# Altium PCB CT310高端控制盒H区按键电路V1.0.PcbDoc
Units mil, origin at the board's own origin, x right, y up, seen from the top; angles counter-clockwise.
Board outline 1460 x 2184.91 mil, 2 copper layers (Top Layer, Bottom Layer), stack 65.792 mil thick; 6 components, 6 nets, 32 pads, 1 vias.
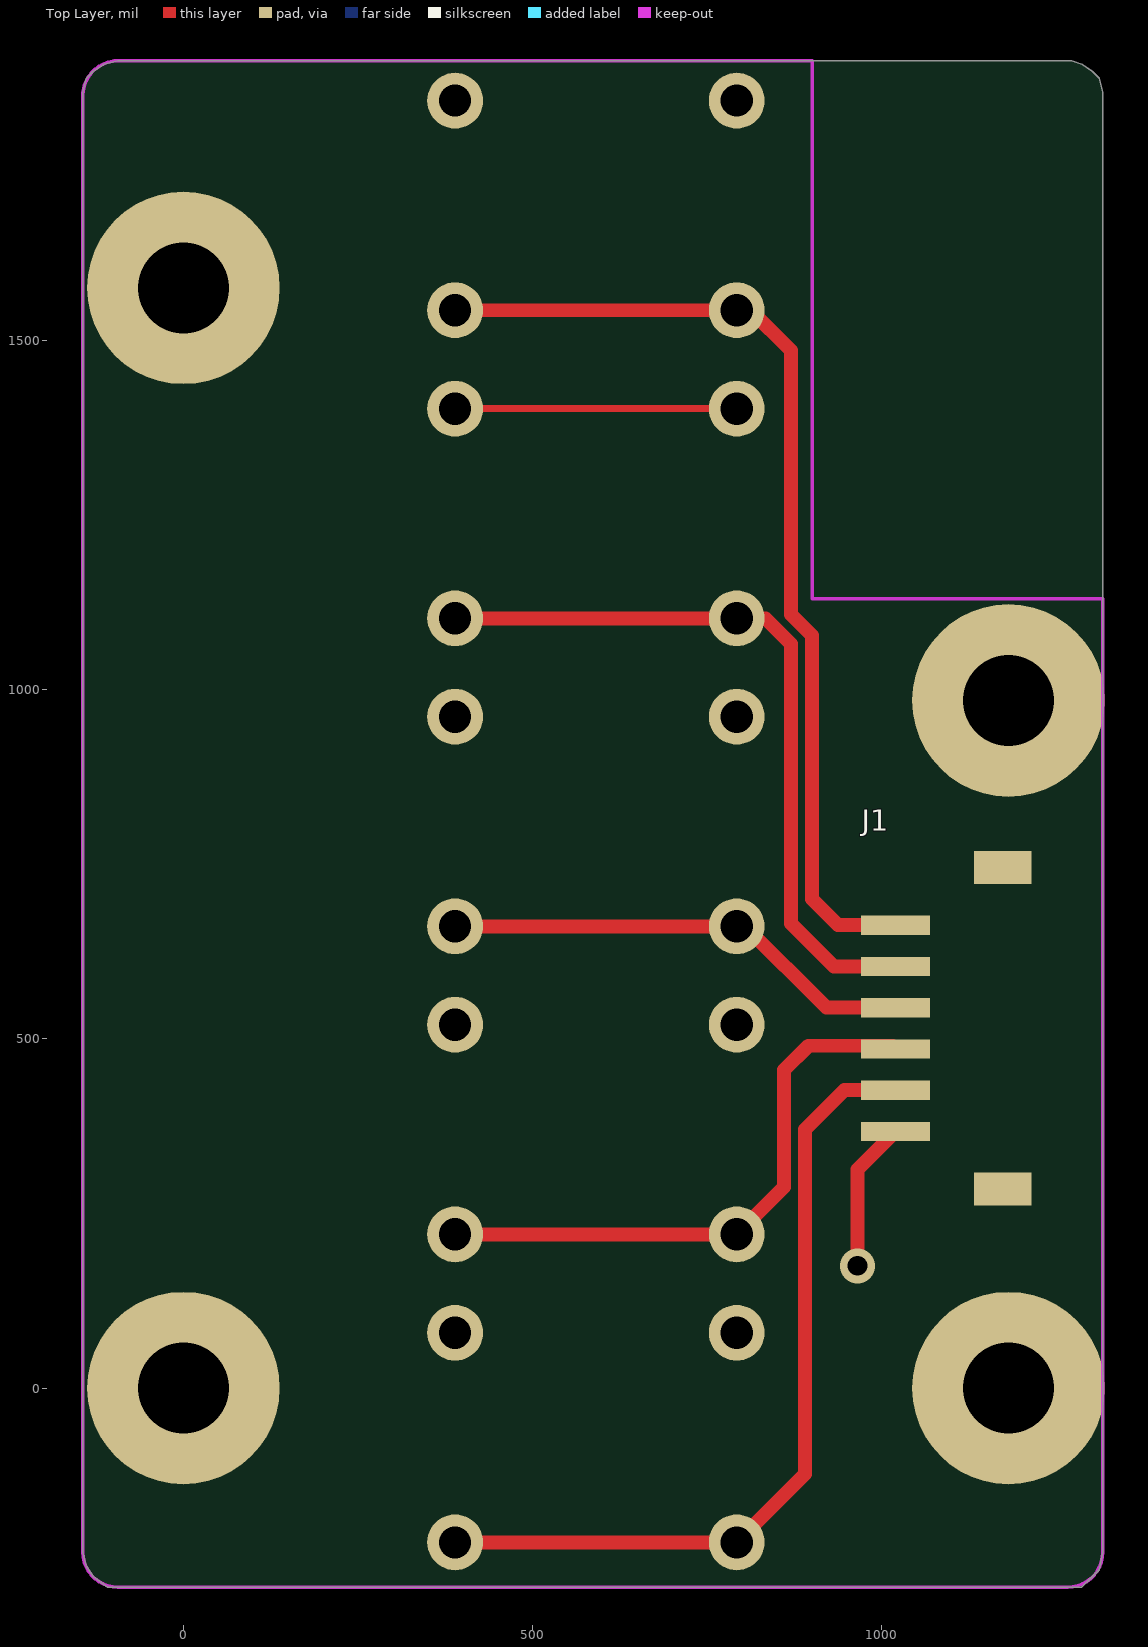
[diagram p0: Top Layer view]
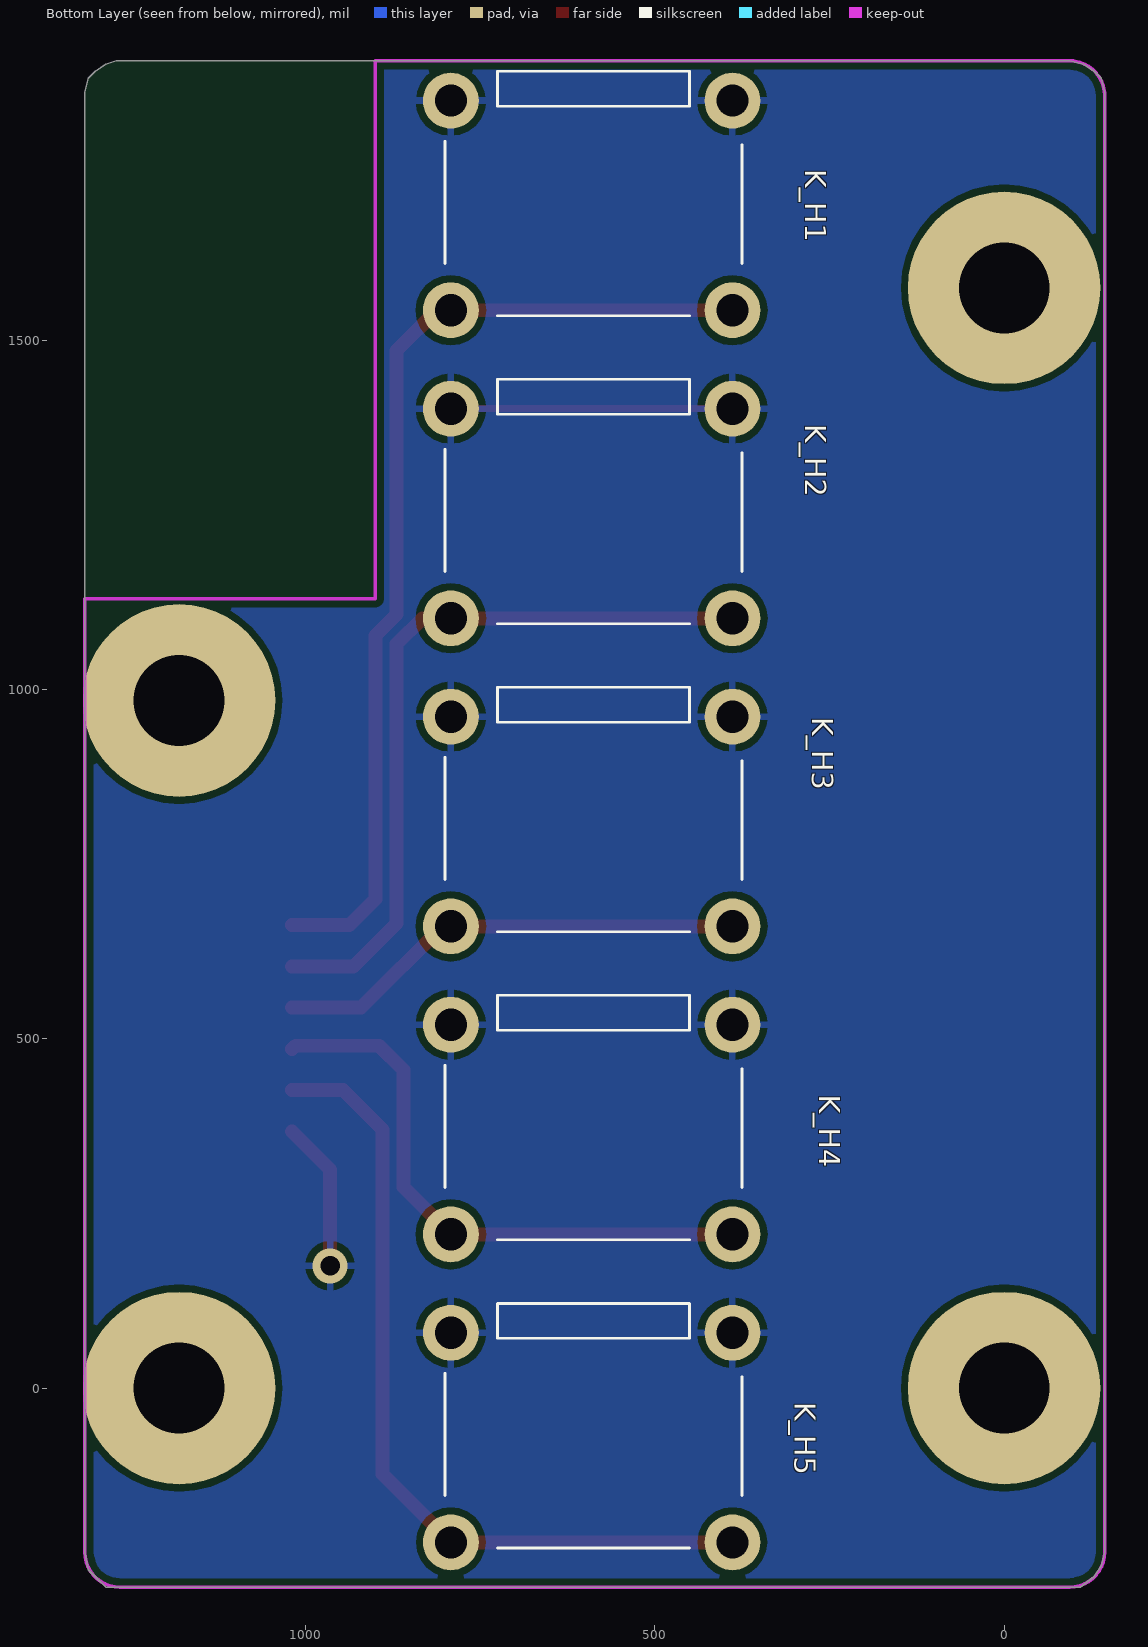
[diagram p1: Bottom Layer view, seen from below]
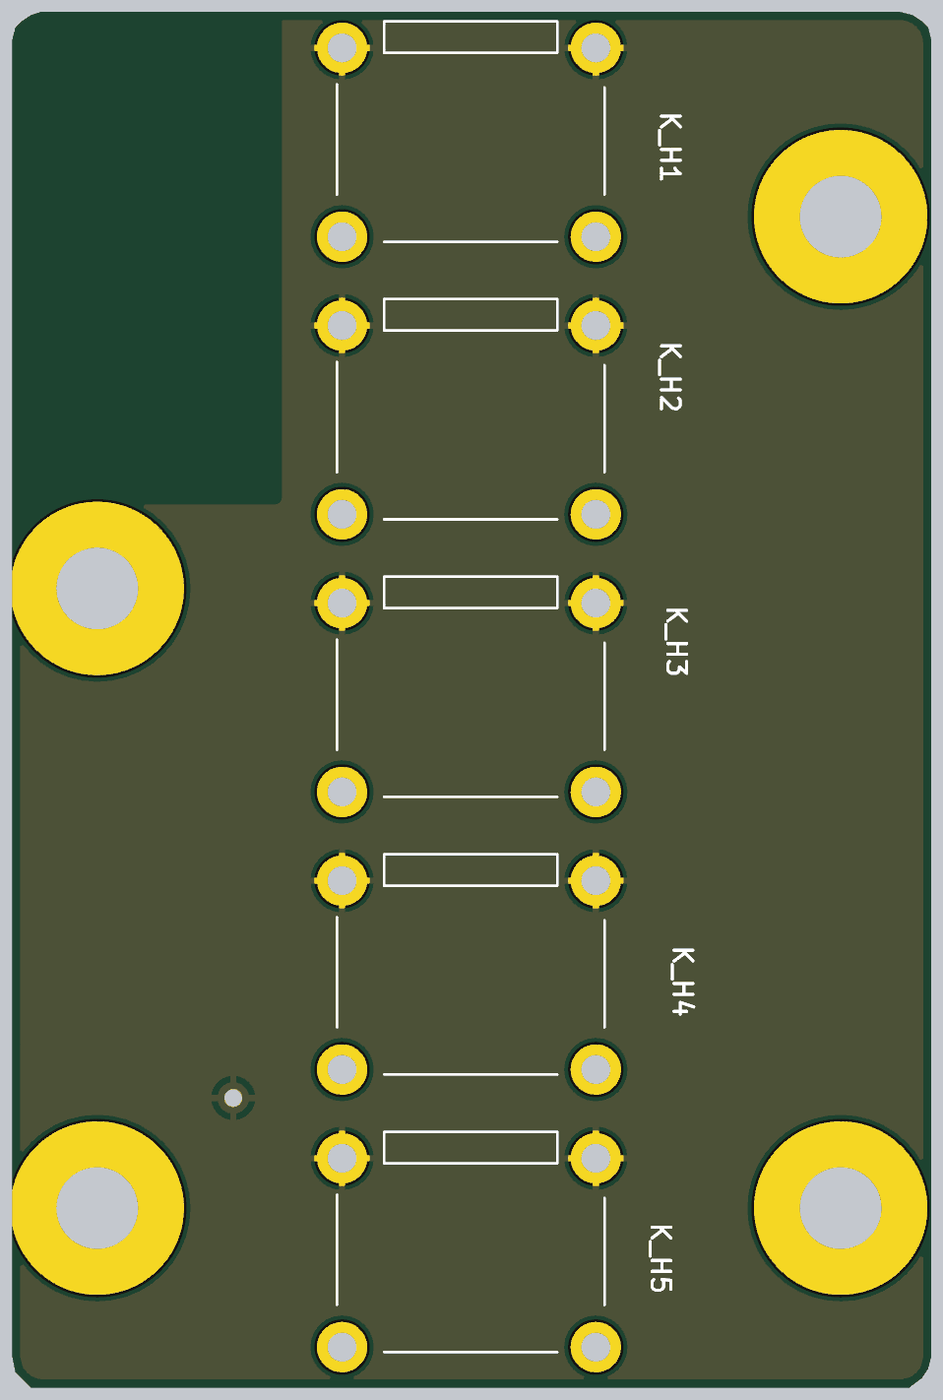
[diagram p2: 3D render of the assembled board from below, using the file's embedded part models]

## Layer stack, top to bottom
Top Layer: signal copper 1.4
Dielectric: core 62.9921, FR-4, Dk 4.8
Bottom Layer: signal copper 1.4

## Board outline
-143.9,-235 -138.9,-255 -128.9,-270 -108.9,-285 -93.9,-285 1266.1,-285 1286.1,-285 1301.1,-270 1311.1,-260 1316.1,-235 1316.1,1855 1311.1,1875 1301.1,1885 1286.1,1895 1271.19,1899.91 -93.9,1899.91 -113.9,1895 -128.9,1885 -138.9,1875 -143.9,1855 -143.9,-235

## Design rules (kind name [scope] priority, off if disabled: settings)
Clearance [All] p1: gap=10
PolygonConnect [All] p1: connectstyle=Relief reliefconductorwidth=10 reliefentries=4 polygonreliefangle="90 Angle" airgapwidth=10
RoutingVias [All] p1: holewidth=28 width=50 viastyle="Through Hole" minholewidth=28 minwidth=50 maxholewidth=28 maxwidth=50
SolderMaskExpansion [All] p1: expansion=4
Width [All] p1: maxlimit=100 minlimit=10 preferedwidth=10 minimp=50.000000 maximp=50.000000 favimp=50.000000
28 further rules are at their usual default settings.

## Components (designator, comment, footprint, x,y, rotation, side; value= is the part's Value field where it differs from the comment)
J1 "HEADER1X6" ZH1X6WT-1.5 1096.1,515 r270 top
K_H1 "SW4" SW-MEC 590.55,1692.92 r0 bottom
K_H2 "SW4" SW-MEC 590.55,1251.97 r0 bottom
K_H3 "SW4" SW-MEC 590.55,811.03 r0 bottom
K_H4 "SW4" SW-MEC 590.55,370.08 r0 bottom
K_H5 "SW4" SW-MEC 590.55,-70.87 r0 bottom

## Footprints (in the part's own frame and the unit in brackets; to place one, negate y for a bottom-side part, rotate by r counter-clockwise, add the part's x,y. Pads: shape width x height; smd on the part's side, far side on the other; paste and mask are expansions set on the pad)
SW-MEC [mil]
  round 80 hole 46: 1(-201.57,-150) 1(201.58,-150) 2(-201.57,150) 2(201.58,150)
  silkscreen extent -215,-192 210,158, body extent -211,-194 202,200, height 395
ZH1X6WT-1.5 [mm]
  rect 1.2x2.1 smd: 0(-5.85,1.95) 0(5.85,1.95)
  rect 0.7x2.5 smd: 1(-3.75,-1.95) 2(-2.25,-1.95) 3(-0.75,-1.95) 4(0.75,-1.95) 5(2.25,-1.95) 6(3.75,-1.95)

## Part data
K_H1 K_H2 K_H3 K_H4 K_H5: library part SW-key

## Free pads (board coordinates)
  round 275.59 hole 129.92: 1(0,0) 1(0,1574.8) 1(1181.1,0) 1(1181.1,984.25)

## Via types
v1: diameter 50, hole 28, Top Layer to Bottom Layer, tented both sides, 1 vias

## Nets (pads, with @x,y where several pads share a name; then routed paths per layer and width w, separated by ;. In a path a pad name is that pad's centre, name@x,y a point inside that pad or via, vN(x,y) a via of type N, cw(c..) or ccw(c..) an arc to the next point about the centre after c; other vN are vias at no path point)
KEYSWIN_H1: J1.1 K_H1.2 | length 1437.2
  Top Layer w20: K_H1.2@388.98,1542.92 792.13,1542.92 812.08,1542.92 870,1485 870,1107.43 900,1077.43 900,700 937.36,662.64 J1.1
KEYSWIN_H2: J1.2 K_H2.2 | length 1071.1
  Top Layer w20: K_H2.2@388.98,1101.97 792.13,1101.97 833.03,1101.97 870,1065 870,665 931.42,603.58 J1.2
KEYSWIN_H3: J1.3 K_H3.2 | length 678.6
  Top Layer w20: K_H3.2@388.98,661.03 792.13,661.03 803.97,661.03 920.47,544.53 J1.3
KEYSWIN_H4: J1.4 K_H4.2 | length 841.9
  Top Layer w20: K_H4.2@388.98,220.08 792.13,220.08 860,287.96 860,455 895,490 1014.8,490 J1.4
KEYSWIN_H5: J1.5 K_H5.2 | length 1187.3
  Top Layer w20: K_H5.2@388.98,-220.86 792.13,-220.86 890,-122.99 890,370 946.42,426.42 J1.5
SGND: J1.6 K_H1.1 K_H2.1 K_H3.1 K_H4.1 K_H5.1 | length 618
  Top Layer w10: K_H2.1@388.98,1401.97 K_H2.1@792.13,1401.97
  Top Layer w20: v1(965,175) 965,313.03 J1.6
pads on no net: J1.0

## Polygon pours and split planes (outlines as drawn)
SGND on Bottom Layer "Keep-Out Layer-No Net" (solid, remove dead copper, pour order 2): -143.9,-210 -143.9,-285 -30,-285 1316.1,-285 1316.1,1130 900,1130 900,1899.91 -90,1899.91 -143.9,1899.91 -143.9,1840 -143.9,-210

## Keep-outs
Keep-Out Layer:
  lines w5: -143.9,1849.91 cw(c-93.9,1849.91) -93.9,1899.91 ; -143.9,1855 -143.9,1320 -143.9,-235 ccw(c-93.9,-235) -93.9,-285 1266.1,-285 ccw(c1266.1,-235) 1316.1,-235 1316.1,1130 ; -98.99,1899.91 900,1899.91 900,1130 1315,1130

## Dimensions
-143.9,-235 to 1316.1,-235 on Keep-Out Layer
-93.9,-285 to -98.99,1899.91 on Keep-Out Layer